# EAGLE board US sensors (EAGLE 7.5.0)
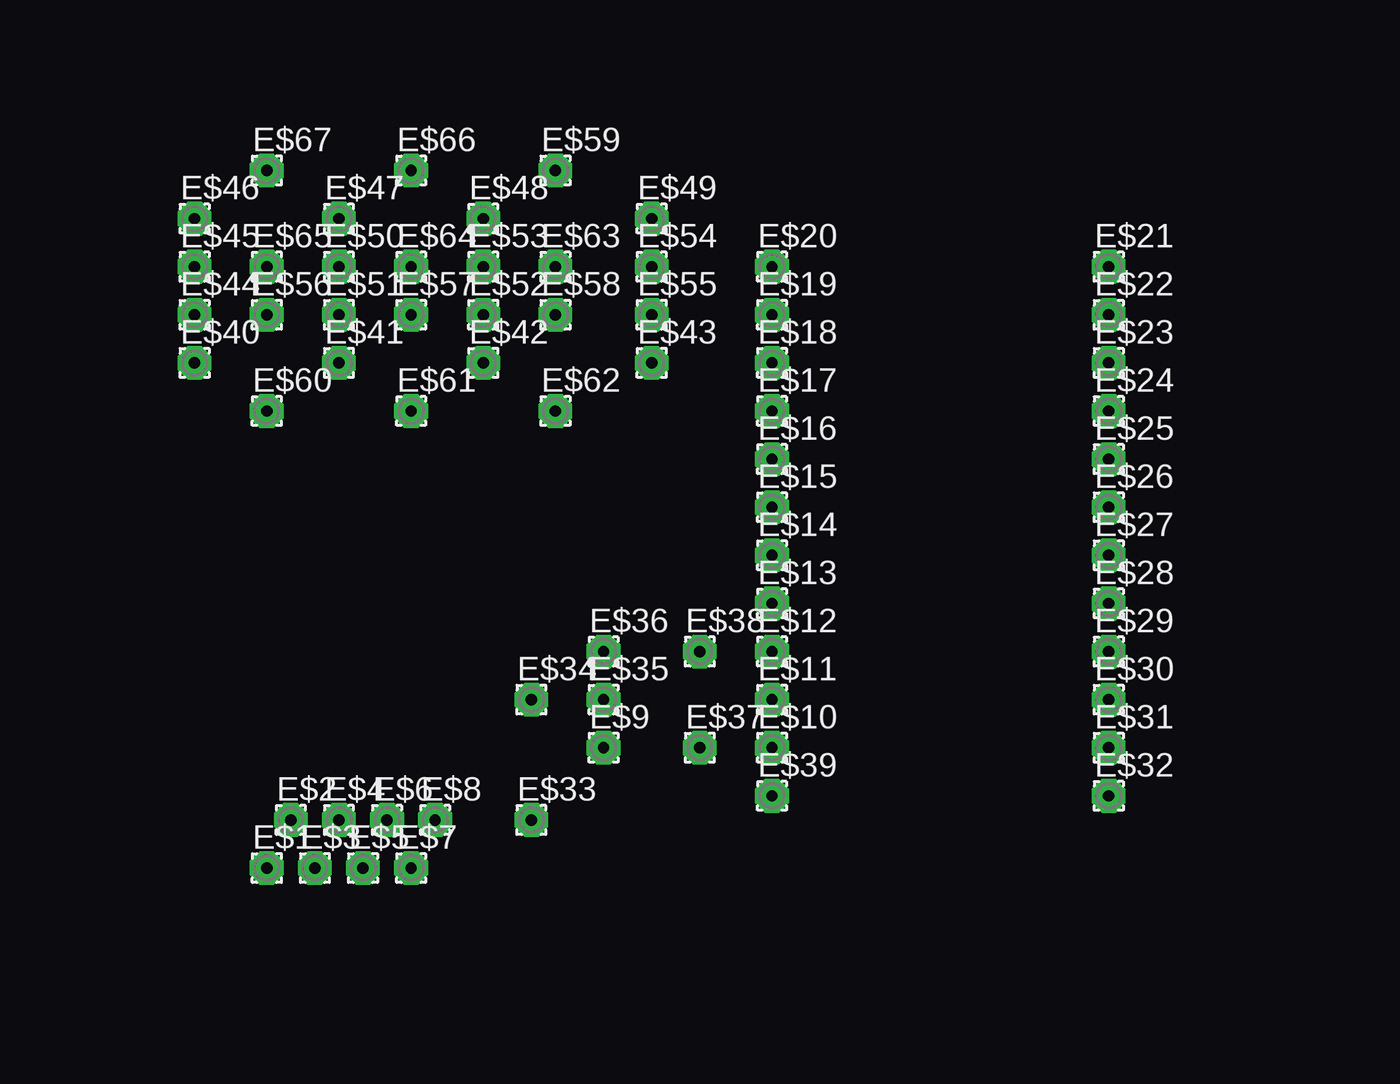
[diagram p0: board, top side]
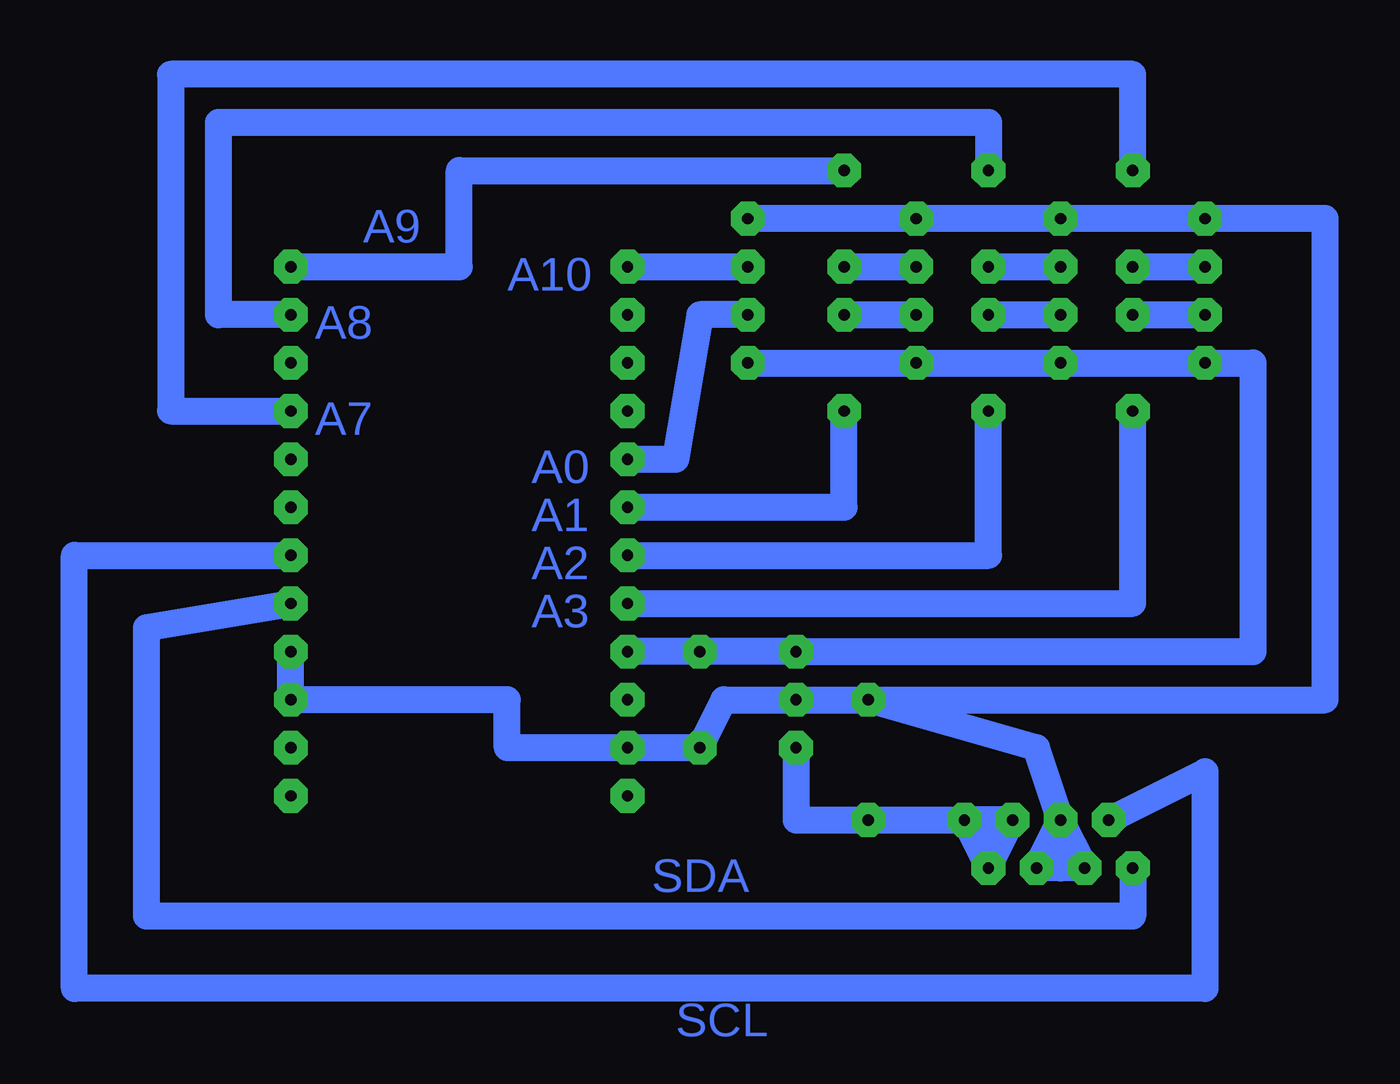
[diagram p1: board, bottom side, seen from below]

No outline drawn. Coordinates in mm, seen from the top.
Copper layers (1*16): Top 0.035mm / dielectric 1.5mm / Bottom 0.035mm
Design rules "default": minimum track width 10mil, minimum drill 24mil, track to track 8mil, track to pad 8mil, pad to pad 8mil, via to via 8mil, smd to smd 8mil, copper to edge 40mil, drill to drill 8mil, minimum pad ring 10mil, minimum via ring 8mil, stop-mask expansion 4mil, vias tented up to drill 0mil, thermal gap 10mil

## Footprints (pad centres in the part's own frame; a part is rotated, then mirrored left to right if it is on the bottom)
1,6/0,8 = drill 0.6 pad 1.778 octagon: 1 0,0

## Placement (x,y rotation side)
E$1  [1,6/0,8]  3.81,5.08 0 top
E$2  [1,6/0,8]  5.08,7.62 0 top
E$3  [1,6/0,8]  6.35,5.08 0 top
E$4  [1,6/0,8]  7.62,7.62 0 top
E$5  [1,6/0,8]  8.89,5.08 0 top
E$6  [1,6/0,8]  10.16,7.62 0 top
E$7  [1,6/0,8]  11.43,5.08 0 top
E$8  [1,6/0,8]  12.7,7.62 0 top
E$9  [1,6/0,8]  21.59,11.43 0 top
E$10  [1,6/0,8]  30.48,11.43 0 top
E$11  [1,6/0,8]  30.48,13.97 0 top
E$12  [1,6/0,8]  30.48,16.51 0 top
E$13  [1,6/0,8]  30.48,19.05 0 top
E$14  [1,6/0,8]  30.48,21.59 0 top
E$15  [1,6/0,8]  30.48,24.13 0 top
E$16  [1,6/0,8]  30.48,26.67 0 top
E$17  [1,6/0,8]  30.48,29.21 0 top
E$18  [1,6/0,8]  30.48,31.75 0 top
E$19  [1,6/0,8]  30.48,34.29 0 top
E$20  [1,6/0,8]  30.48,36.83 0 top
E$21  [1,6/0,8]  48.26,36.83 0 top
E$22  [1,6/0,8]  48.26,34.29 0 top
E$23  [1,6/0,8]  48.26,31.75 0 top
E$24  [1,6/0,8]  48.26,29.21 0 top
E$25  [1,6/0,8]  48.26,26.67 0 top
E$26  [1,6/0,8]  48.26,24.13 0 top
E$27  [1,6/0,8]  48.26,21.59 0 top
E$28  [1,6/0,8]  48.26,19.05 0 top
E$29  [1,6/0,8]  48.26,16.51 0 top
E$30  [1,6/0,8]  48.26,13.97 0 top
E$31  [1,6/0,8]  48.26,11.43 0 top
E$32  [1,6/0,8]  48.26,8.89 0 top
E$33  [1,6/0,8]  17.78,7.62 0 top
E$34  [1,6/0,8]  17.78,13.97 0 top
E$35  [1,6/0,8]  21.59,13.97 0 top
E$36  [1,6/0,8]  21.59,16.51 0 top
E$37  [1,6/0,8]  26.67,11.43 0 top
E$38  [1,6/0,8]  26.67,16.51 0 top
E$39  [1,6/0,8]  30.48,8.89 0 top
E$40  [1,6/0,8]  0,31.75 0 top
E$41  [1,6/0,8]  7.62,31.75 0 top
E$42  [1,6/0,8]  15.24,31.75 0 top
E$43  [1,6/0,8]  24.13,31.75 0 top
E$44  [1,6/0,8]  0,34.29 0 top
E$45  [1,6/0,8]  0,36.83 0 top
E$46  [1,6/0,8]  0,39.37 0 top
E$47  [1,6/0,8]  7.62,39.37 0 top
E$48  [1,6/0,8]  15.24,39.37 0 top
E$49  [1,6/0,8]  24.13,39.37 0 top
E$50  [1,6/0,8]  7.62,36.83 0 top
E$51  [1,6/0,8]  7.62,34.29 0 top
E$52  [1,6/0,8]  15.24,34.29 0 top
E$53  [1,6/0,8]  15.24,36.83 0 top
E$54  [1,6/0,8]  24.13,36.83 0 top
E$55  [1,6/0,8]  24.13,34.29 0 top
E$56  [1,6/0,8]  3.81,34.29 0 top
E$57  [1,6/0,8]  11.43,34.29 0 top
E$58  [1,6/0,8]  19.05,34.29 0 top
E$59  [1,6/0,8]  19.05,41.91 0 top
E$60  [1,6/0,8]  3.81,29.21 0 top
E$61  [1,6/0,8]  11.43,29.21 0 top
E$62  [1,6/0,8]  19.05,29.21 0 top
E$63  [1,6/0,8]  19.05,36.83 0 top
E$64  [1,6/0,8]  11.43,36.83 0 top
E$65  [1,6/0,8]  3.81,36.83 0 top
E$66  [1,6/0,8]  11.43,41.91 0 top
E$67  [1,6/0,8]  3.81,41.91 0 top

## Library data of the parts
E$1-E$67 = cls

## Nets
S$1: E$3.1 E$4.1 E$5.1 E$10.1 E$29.1 E$30.1 E$35.1 E$46.1 E$49.1
S$2: E$13.1 E$60.1
S$3: E$6.1 E$7.1 E$8.1 E$9.1
S$4: E$1.1 E$28.1
S$5: E$2.1 E$27.1
S$6: E$12.1 E$36.1 E$38.1 E$43.1
S$7: E$44.1 E$56.1
S$8: E$51.1 E$57.1
S$9: E$52.1 E$58.1
S$11: E$14.1 E$61.1
S$12: E$15.1 E$62.1
S$13: E$20.1 E$54.1
S$14: E$21.1
S$15: E$53.1 E$63.1
S$16: E$22.1 E$66.1
S$17: E$24.1 E$67.1
S$18: E$50.1 E$64.1
S$19: E$45.1 E$65.1
S$20: E$16.1 E$55.1

## Tracks (layer width: path | path; a pad name or v marks a point on that pad's centre or on a via)
S$1
  Bottom 1.422: E$4.1 E$3.1 7.62,5.08 | 7.62,5.08 E$5.1 E$4.1 | E$4.1 7.62,5.08 | E$4.1 8.89,11.43 17.78,13.97 | E$29.1 E$30.1 36.83,13.97 36.83,11.43 E$10.1 26.67,11.43 25.4,13.97 E$35.1 17.78,13.97 | 17.78,13.97 -6.35,13.97 -6.35,39.37 E$46.1 E$49.1
S$2
  Bottom 1.422: E$13.1 3.81,19.05 E$60.1
S$3
  Bottom 1.422: E$9.1 21.59,7.62 E$8.1 | 11.43,7.62 E$8.1 | E$8.1 E$7.1 | E$7.1 E$6.1 11.43,7.62 | 11.43,7.62 E$7.1
S$4
  Bottom 1.422: E$1.1 3.81,2.54 55.88,2.54 55.88,17.78 E$28.1
S$5
  Bottom 1.422: E$2.1 0,10.16 0,-1.27 59.69,-1.27 59.69,21.59 E$27.1
S$6
  Bottom 1.422: E$43.1 -2.54,31.75 -2.54,16.51 E$36.1 E$38.1 E$12.1
S$7
  Bottom 1.422: E$56.1 E$44.1
S$8
  Bottom 1.422: E$57.1 E$51.1
S$9
  Bottom 1.422: E$58.1 E$52.1
S$11
  Bottom 1.422: E$14.1 11.43,21.59 E$61.1
S$12
  Bottom 1.422: E$15.1 19.05,24.13 E$62.1
S$13
  Bottom 1.422: E$20.1 E$54.1
S$14
  Bottom 1.422: E$21.1 39.37,36.83 39.37,41.91 19.05,41.91
S$15
  Bottom 1.422: E$63.1 E$53.1
S$16
  Bottom 1.422: E$22.1 52.07,34.29 52.07,44.45 11.43,44.45 E$66.1
S$17
  Bottom 1.422: E$67.1 3.81,46.99 54.61,46.99 54.61,29.21 E$24.1
S$18
  Bottom 1.422: E$64.1 E$50.1
S$19
  Bottom 1.422: E$65.1 E$45.1
S$20
  Bottom 1.422: E$55.1 26.67,34.29 27.94,26.67 E$16.1

## Text on the board
Bottom: A9 | A10 | A8 | A7 | A0 | A1 | A2 | A3 | SDA | SCL